# EAGLE board class b (EAGLE 9.6.2)
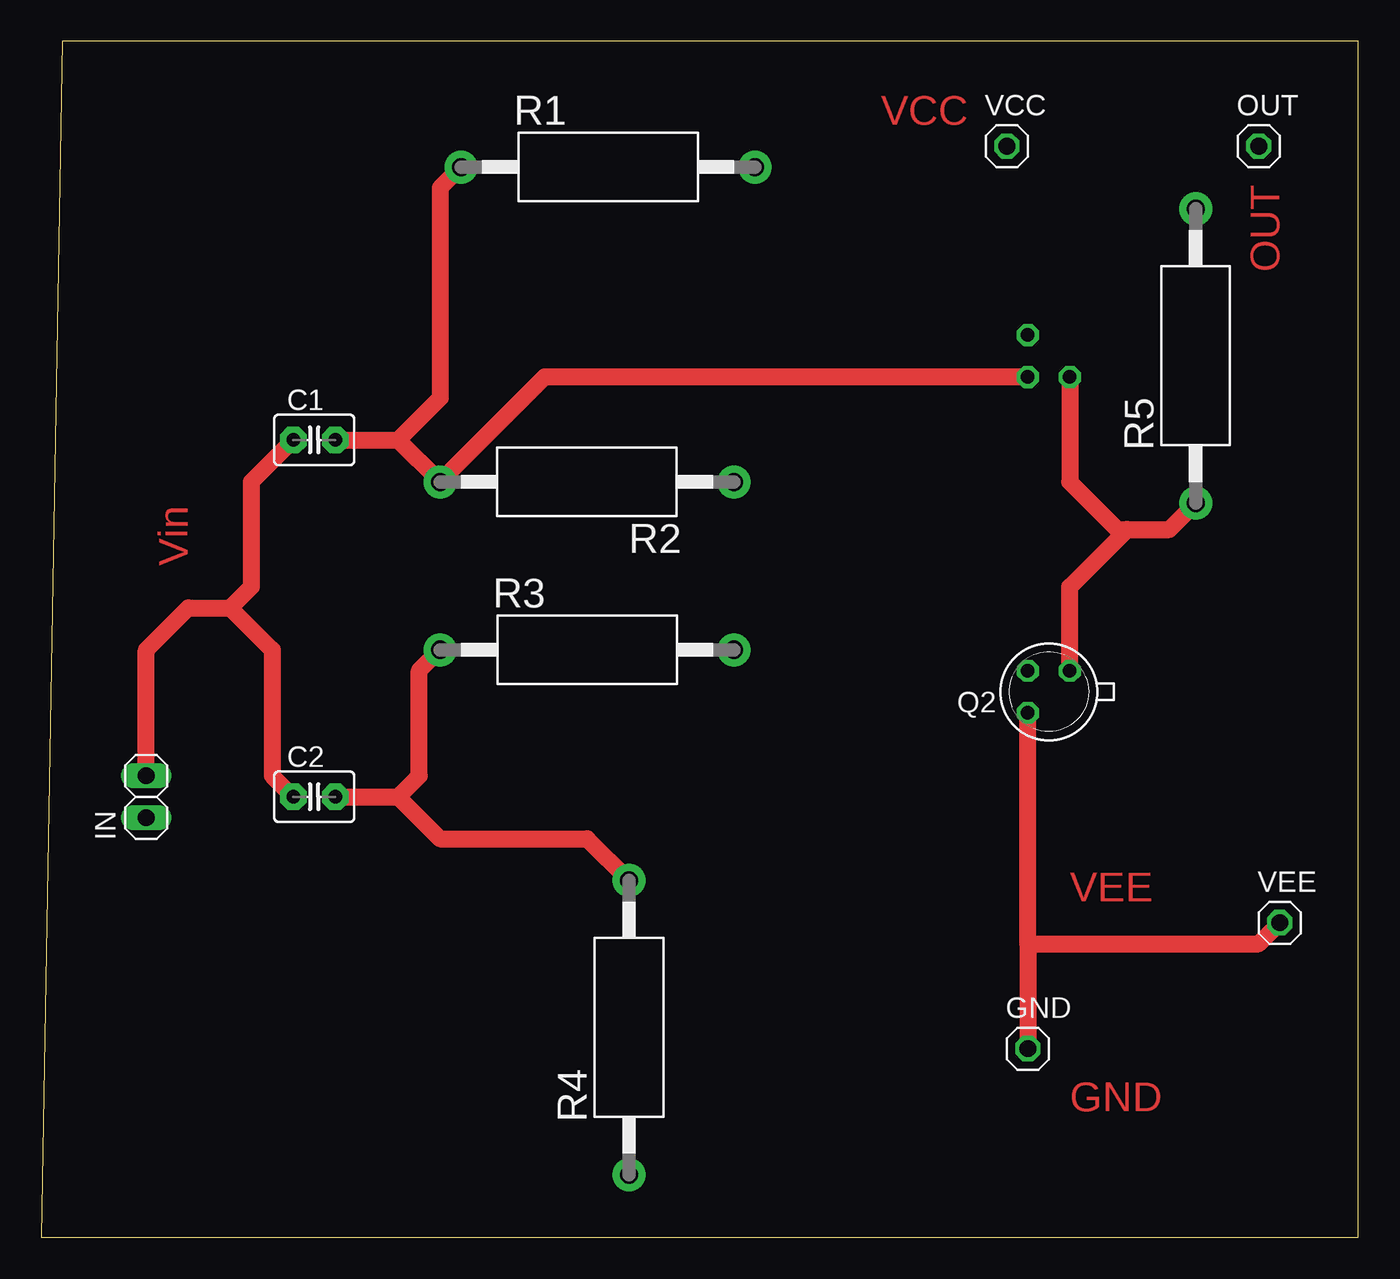
[diagram p0: board, top side]
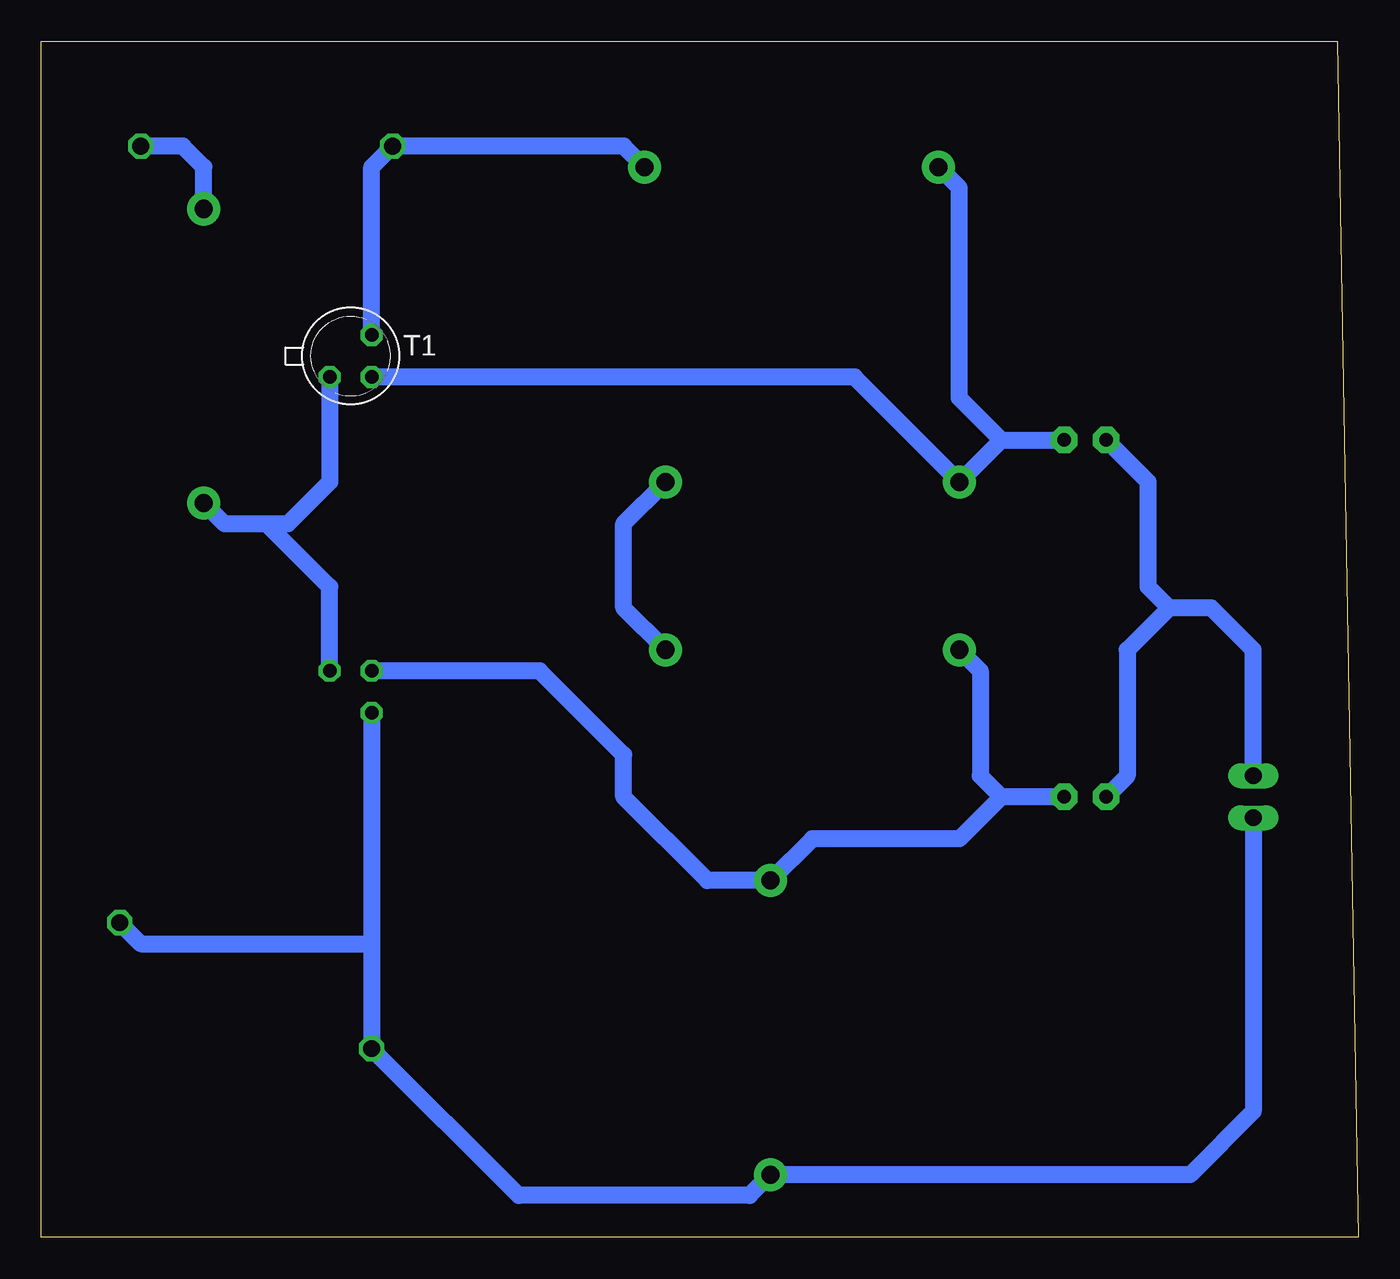
[diagram p1: board, bottom side, seen from below]

Size 79.68 x 72.38 mm. Coordinates in mm from the lower left corner, seen from the top.
Outline: 0,0 79.68,0 79.68,72.38 1.27,72.38 0,0
Copper layers (1*16): Top 0.035mm / dielectric 1.5mm / Bottom 0.035mm
Design rules "default": minimum track width 6mil, minimum drill 0.35mm, track to track 6mil, track to pad 6mil, pad to pad 6mil, via to via 6mil, smd to smd 6mil, copper to edge 40mil, drill to drill 6mil, minimum pad ring 10mil, minimum via ring 8mil, stop-mask expansion 4mil, vias tented up to drill 0mil, thermal gap 10mil

## Footprints (pad centres in the part's own frame; a part is rotated, then mirrored left to right if it is on the bottom)
C2.5-3 = drill 0.813 pad 1.6 octagon: 1 -1.27,0; 2 1.27,0
1X01 = drill 1.016 octagon: 1 0,0
1X02 = drill 1.016 long: 1 -1.27,0; 2 1.27,0
TO18 = drill 0.813 octagon: 1 -1.27,-1.27; 2 1.27,-1.27; 3 1.27,1.27
AC01 = drill 1.1 pad 2: 1 -8.9,0; 2 8.9,0

## Placement (x,y rotation side)
C1  [C2.5-3]  16.51,48.26 0 top
C2  [C2.5-3]  16.51,26.67 0 top
GND  [1X01]  59.69,11.43 0 top
IN  [1X02]  6.35,26.67 90 top
OUT  [1X01]  73.66,66.04 0 top
Q2  2N2907  [TO18]  60.96,33.02 180 top
R1  [AC01]  34.29,64.77 0 top
R2  [AC01]  33.02,45.72 180 top
R3  [AC01]  33.02,35.56 0 top
R4  [AC01]  35.56,12.7 90 top
R5  [AC01]  69.85,53.34 90 top
T1  2N2222  [TO18]  60.96,53.34 0 bottom
VCC  [1X01]  58.42,66.04 0 top
VEE  [1X01]  74.93,19.05 0 top

## Library data of the parts
C1 C2 = capacitor-wima
GND IN OUT VCC VEE = pinhead
Q2 = transistor-pnp
R1-R5 = resistor-power; OC_FARNELL: unknown; OC_NEWARK: unknown
T1 = transistor

## Nets
N$1: R2.1 R3.2
N$2: C1.1 C2.1 IN.2
N$3: C1.2 R1.1 R2.2 T1.2
N$4: C2.2 Q2.2 R3.1 R4.2
N$7: Q2.1 R5.1 T1.1
N$8: OUT.1 R5.2
VCC: R1.2 T1.3 VCC.1
VEE: GND.1 IN.1 Q2.3 R4.1 VEE.1

## Tracks (layer width: path | path; a pad name or v marks a point on that pad's centre or on a via)
N$1
  Bottom 1.016: R3.2 44.45,38.1 44.45,43.19 R2.1
N$2
  Top 1.016: C1.1 12.7,45.72 12.7,39.37 11.43,38.1 | C2.1 13.97,27.94 13.97,35.56 11.43,38.1 | 11.43,38.1 8.89,38.1 6.35,35.56 IN.2
  Bottom 1.016: IN.2 6.35,35.56 8.89,38.1 11.43,38.1 | 11.43,38.1 13.97,35.56 13.97,27.94 C2.1 | 11.43,38.1 12.7,39.37 12.7,45.72 C1.1
N$3
  Top 1.016: C1.2 21.59,48.26 | R2.2 21.59,48.26 | R2.2 | 21.59,48.26 24.13,50.8 24.13,63.51 R1.1 | T1.2 30.46,52.07 R2.2
  Bottom 1.016: 21.59,48.26 C1.2 | 21.59,48.26 21.59,48.25 R2.2 30.47,52.07 T1.2 | 21.59,48.26 24.13,50.8 24.13,63.51 R1.1
N$4
  Top 1.016: C2.2 21.59,26.67 | 21.59,26.67 24.13,24.13 33.03,24.13 R4.2 | 21.59,26.67 22.86,27.94 22.86,34.3 R3.1
  Bottom 1.016: C2.2 21.59,26.67 | 21.59,26.67 24.13,24.13 33.03,24.13 R4.2 39.38,21.6 44.45,26.67 44.45,29.21 49.53,34.29 Q2.2 | R3.1 22.86,34.29 22.86,27.94 21.59,26.67
N$7
  Top 1.016: Q2.1 62.23,39.37 65.71,42.85 | T1.1 62.23,45.72 65.1,42.85 65.71,42.85 | 65.71,42.85 68.26,42.85 R5.1
  Bottom 1.016: T1.1 62.23,45.72 64.77,43.18 66.04,43.18 | R5.1 68.58,43.18 66.04,43.18 | Q2.1 62.23,39.37 66.04,43.18
N$8
  Bottom 1.016: R5.2 69.85,64.77 71.12,66.04 OUT.1
VCC
  Bottom 1.016: R1.2 44.45,66.04 VCC.1 59.69,64.77 T1.3
VEE
  Top 1.016: 59.69,17.78 Q2.3 | 59.69,17.78 GND.1 | VEE.1 73.66,17.78 59.69,17.78
  Bottom 1.016: IN.1 6.35,7.62 10.17,3.8 R4.1 36.83,2.54 50.8,2.54 GND.1 59.69,15.24 59.69,17.78 | Q2.3 59.69,17.78 | VEE.1 73.66,17.78 59.69,17.78

## Text on the board
Top: VCC | OUT | Vin | VEE | GND